# Altium PCB higgsant.PcbDoc
Units mm, origin at the board's own origin, x right, y up, seen from the top; angles counter-clockwise.
Board outline 200 x 200 mm, 4 copper layers (Top Layer, Signal Layer 1, Signal Layer 2, Bottom Layer), stack 1.667 mm thick; 22 components, 3 nets, 46 pads, 477 vias.
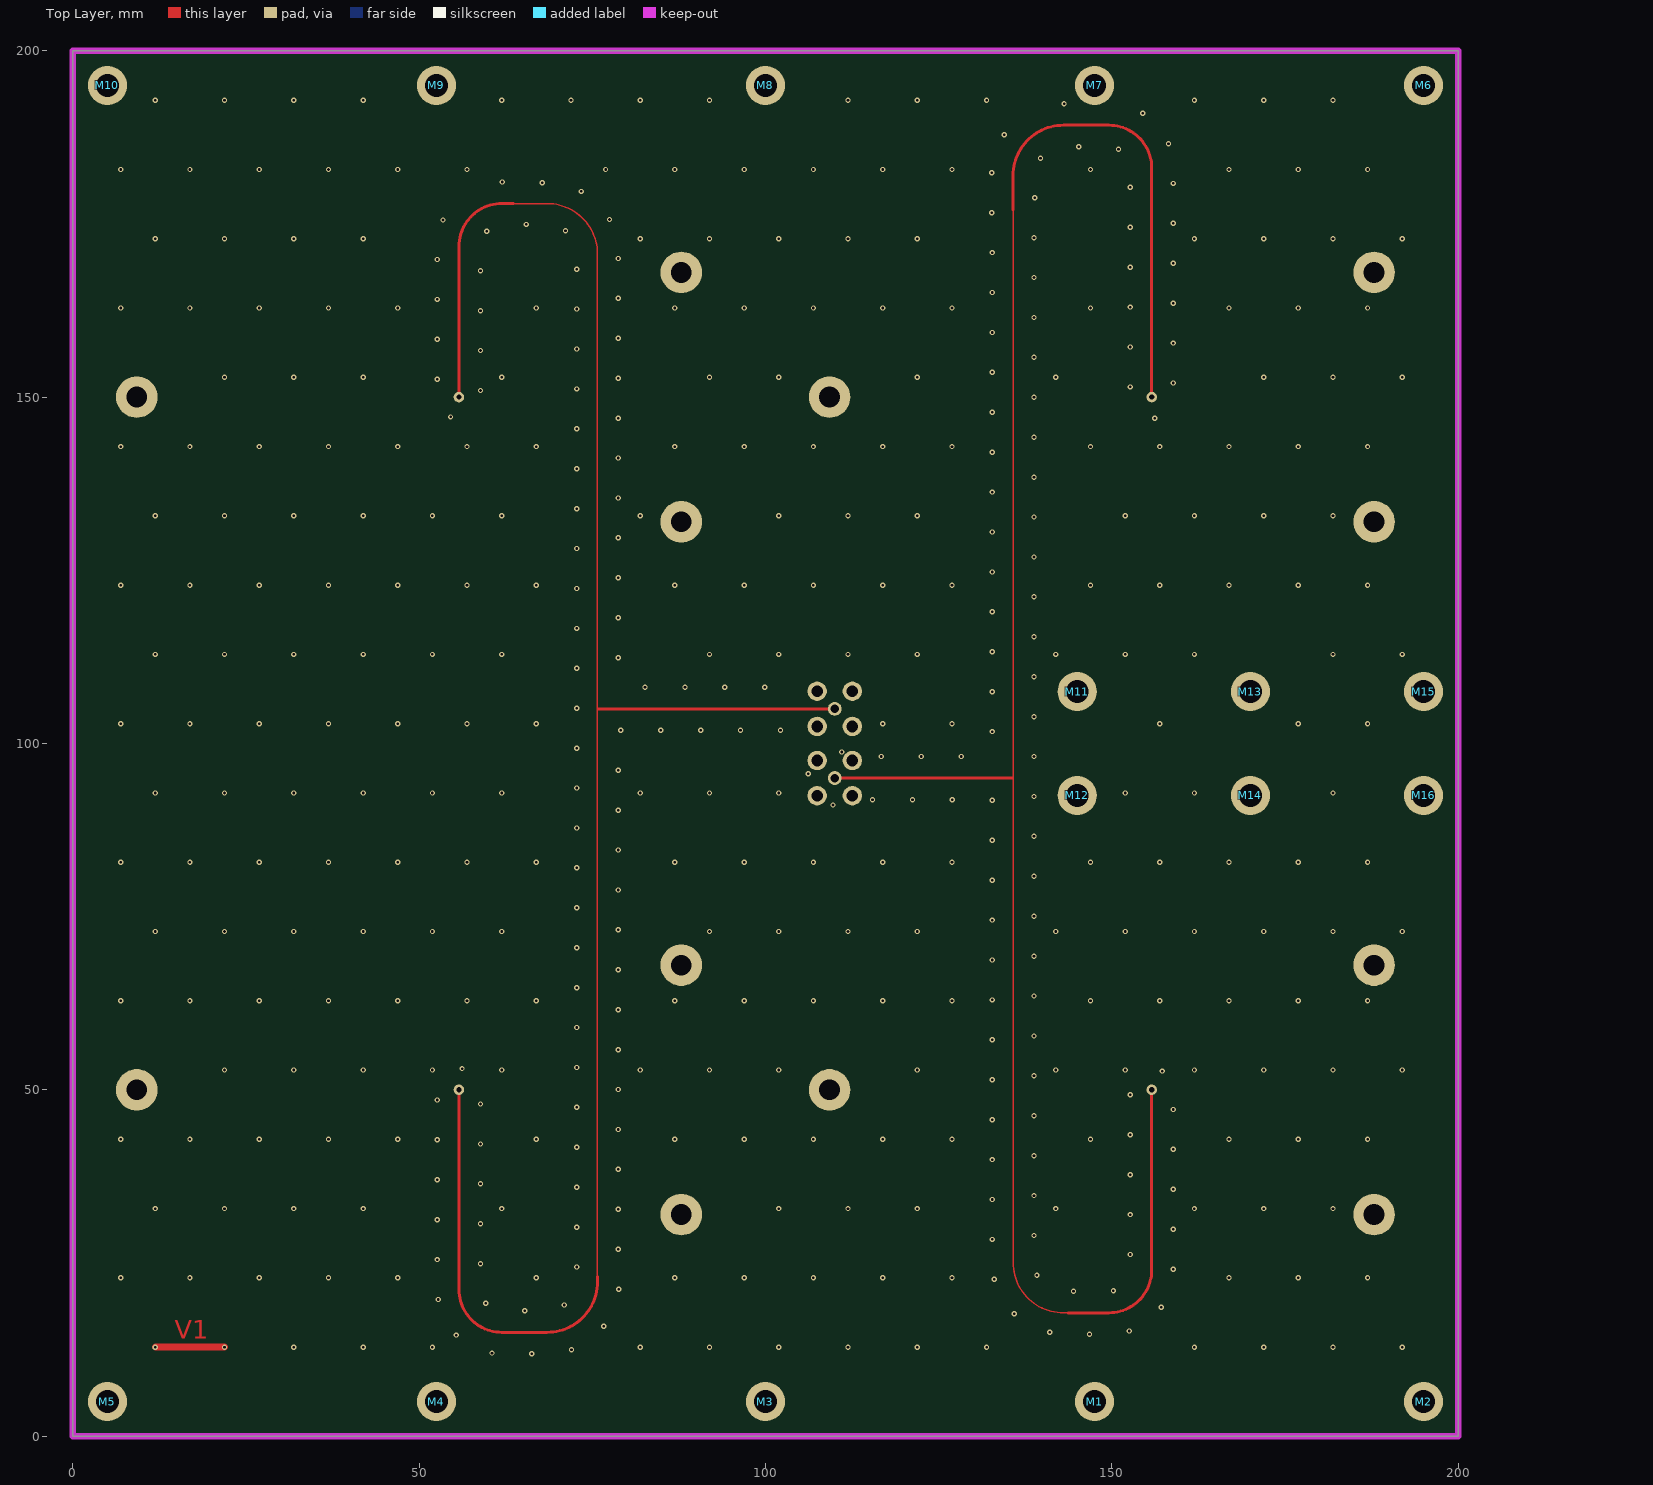
[diagram p0: Top Layer view]
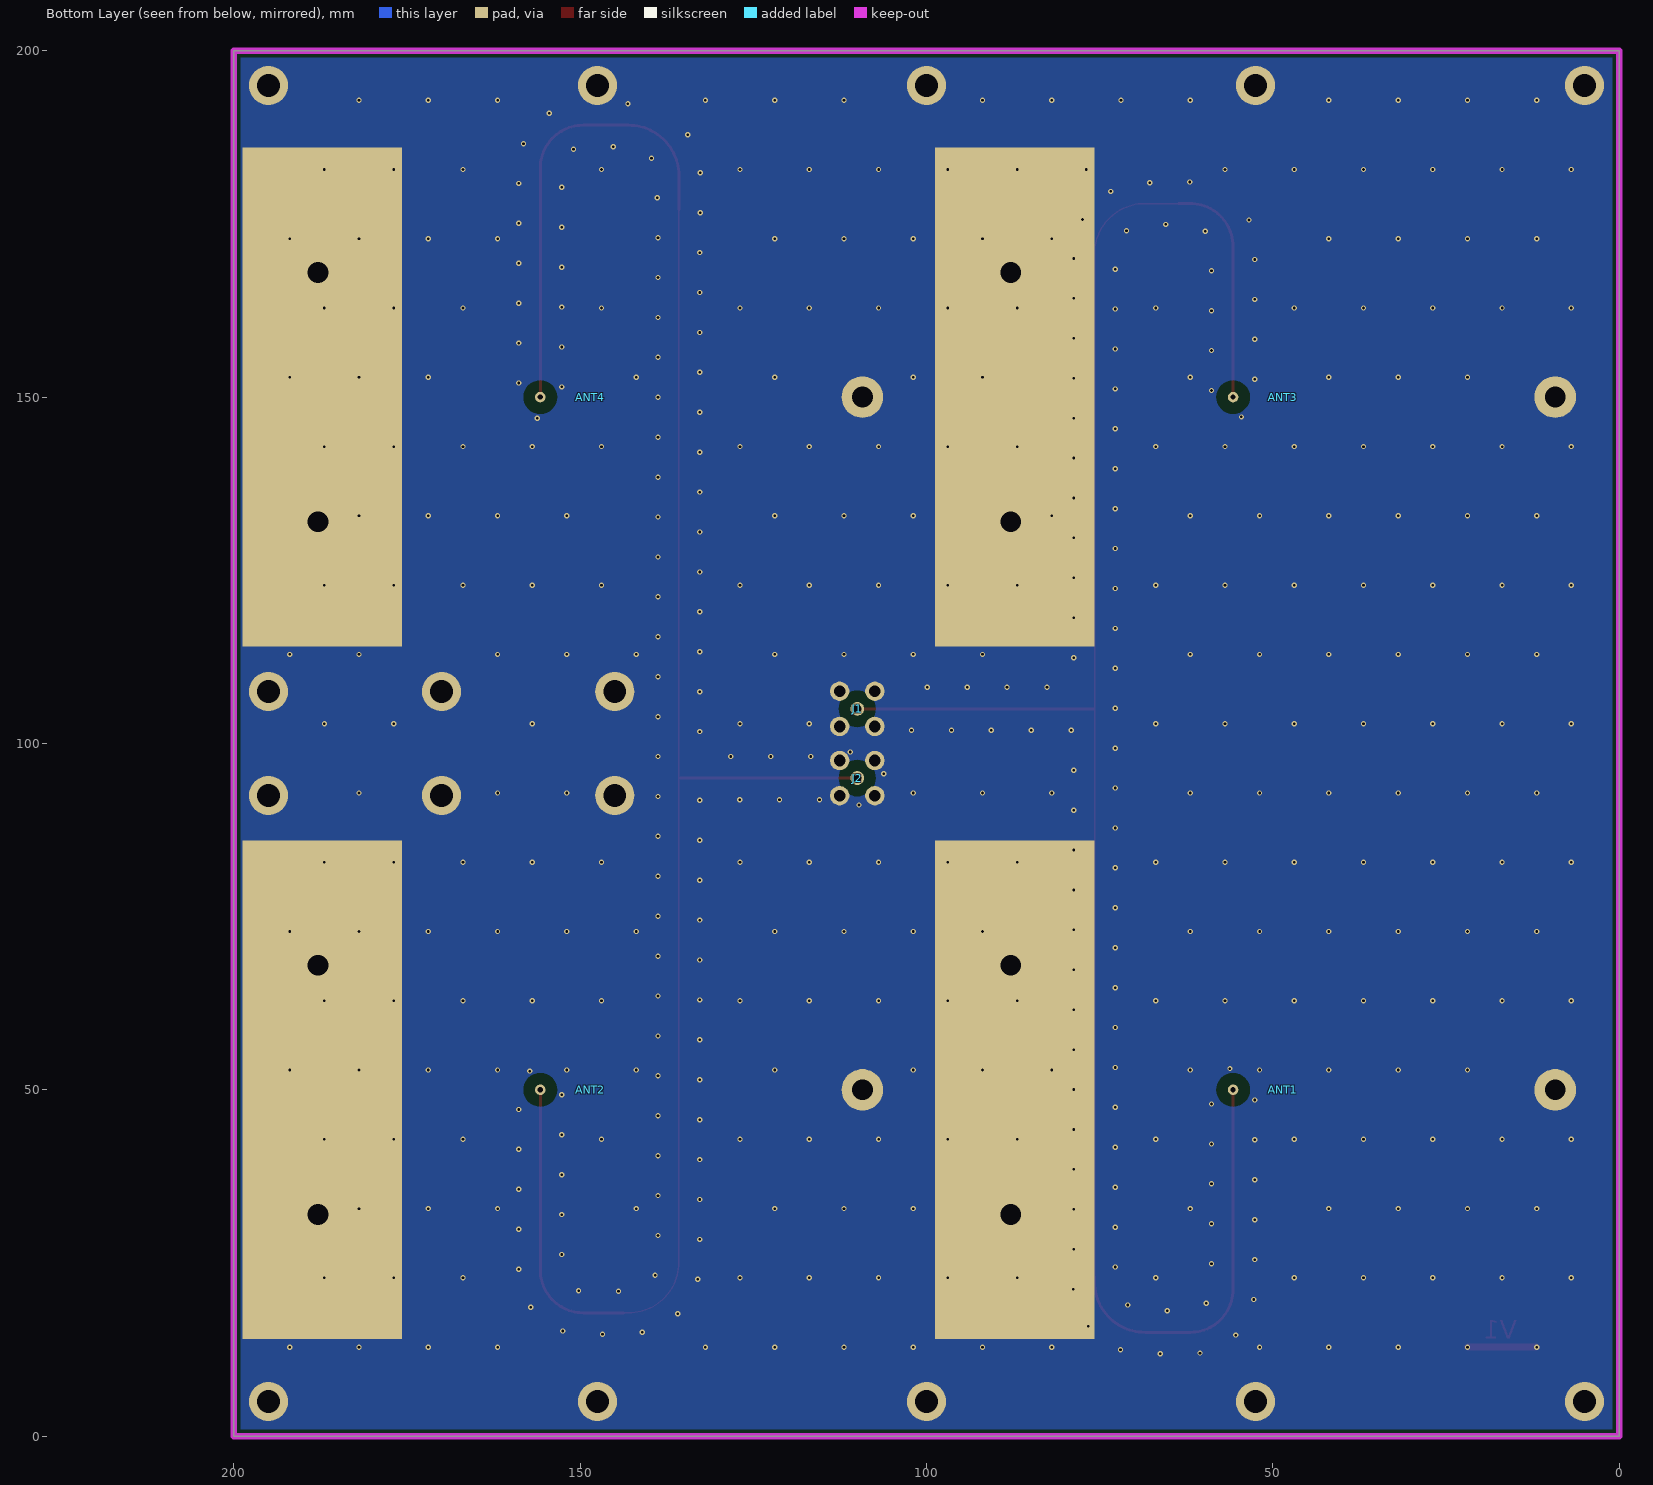
[diagram p1: Bottom Layer view, seen from below]
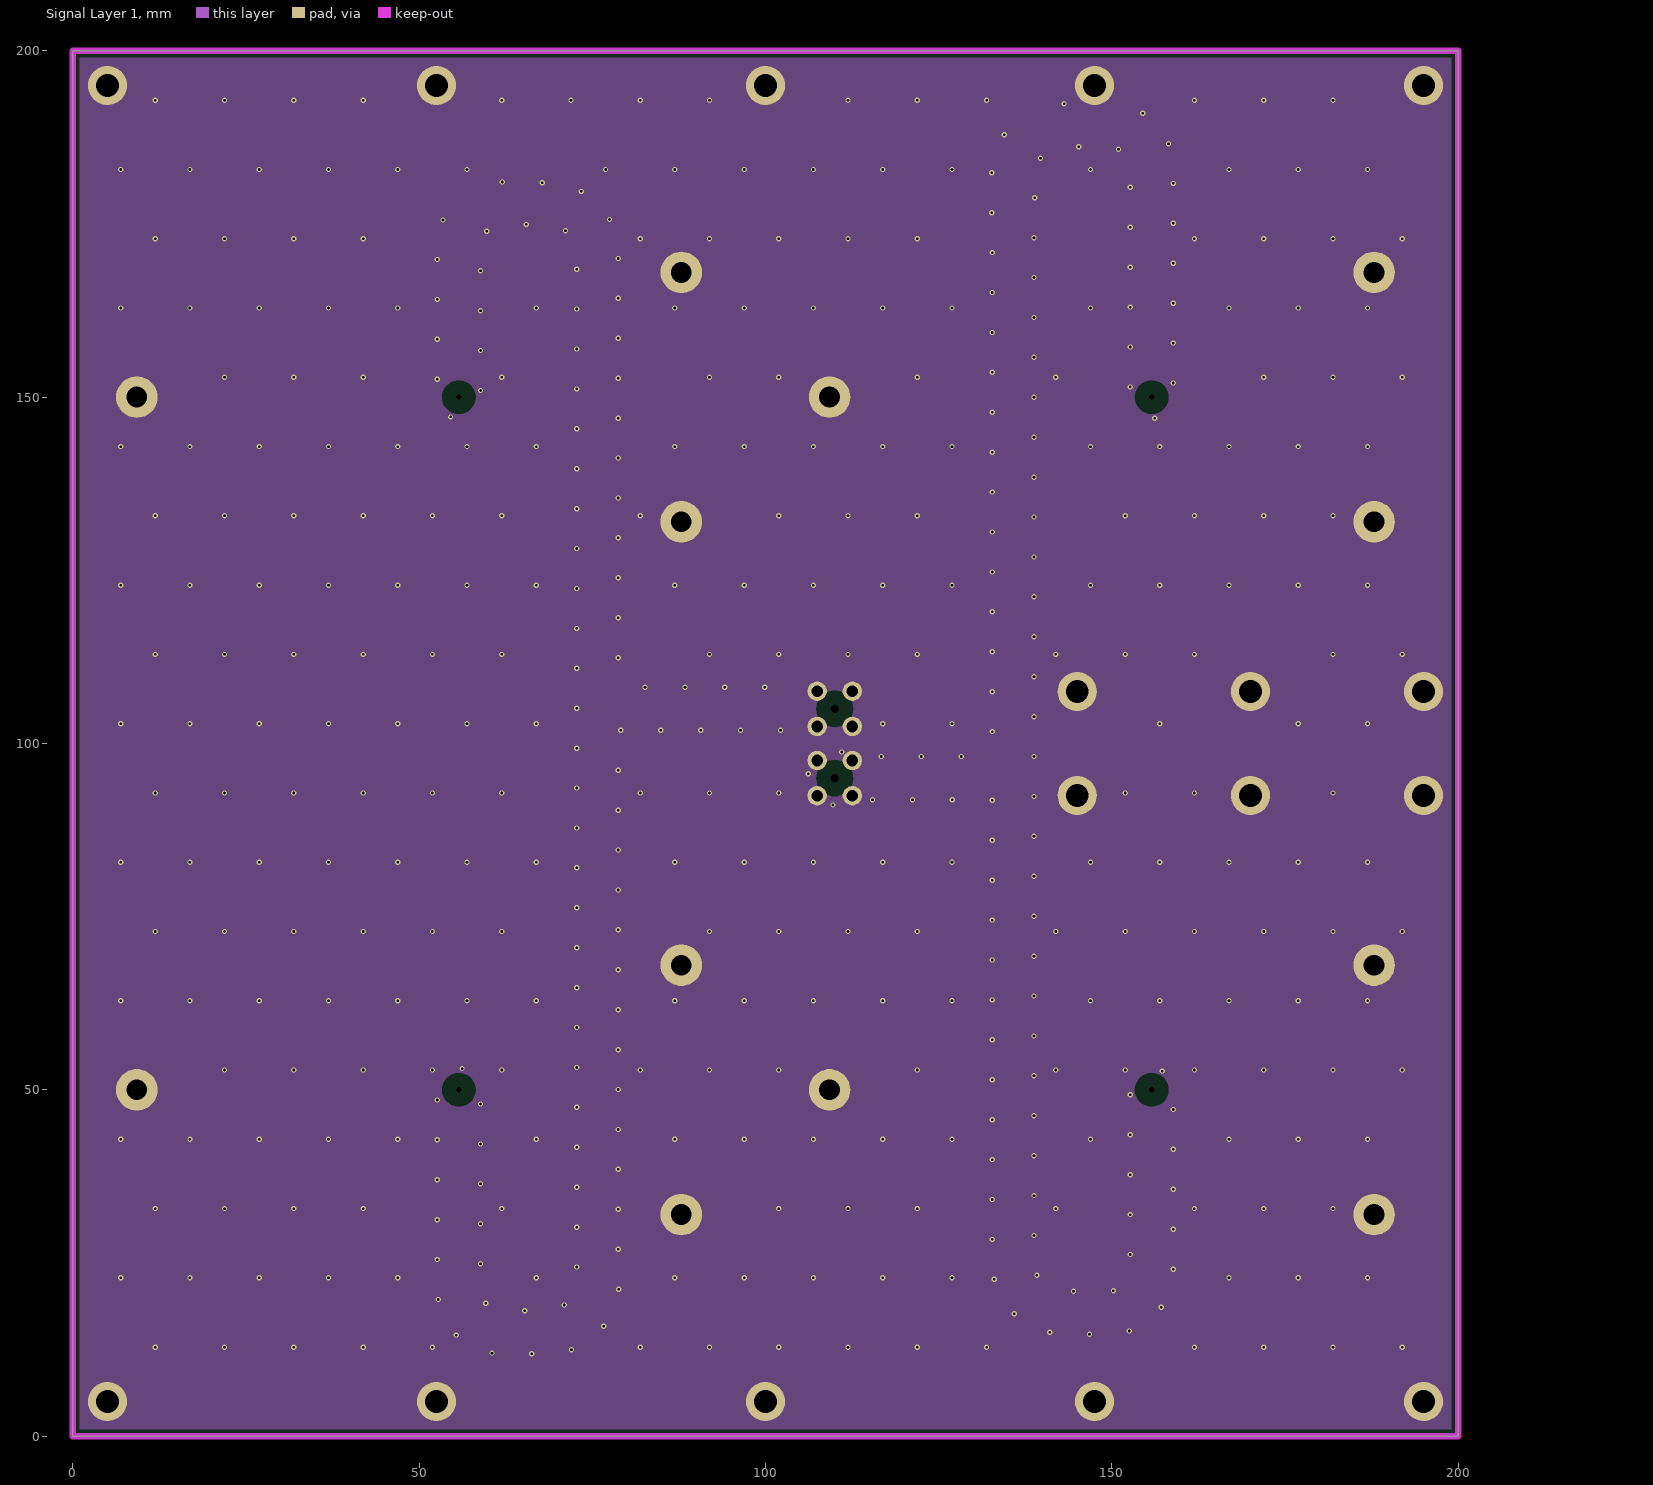
[diagram p2: Signal Layer 1]
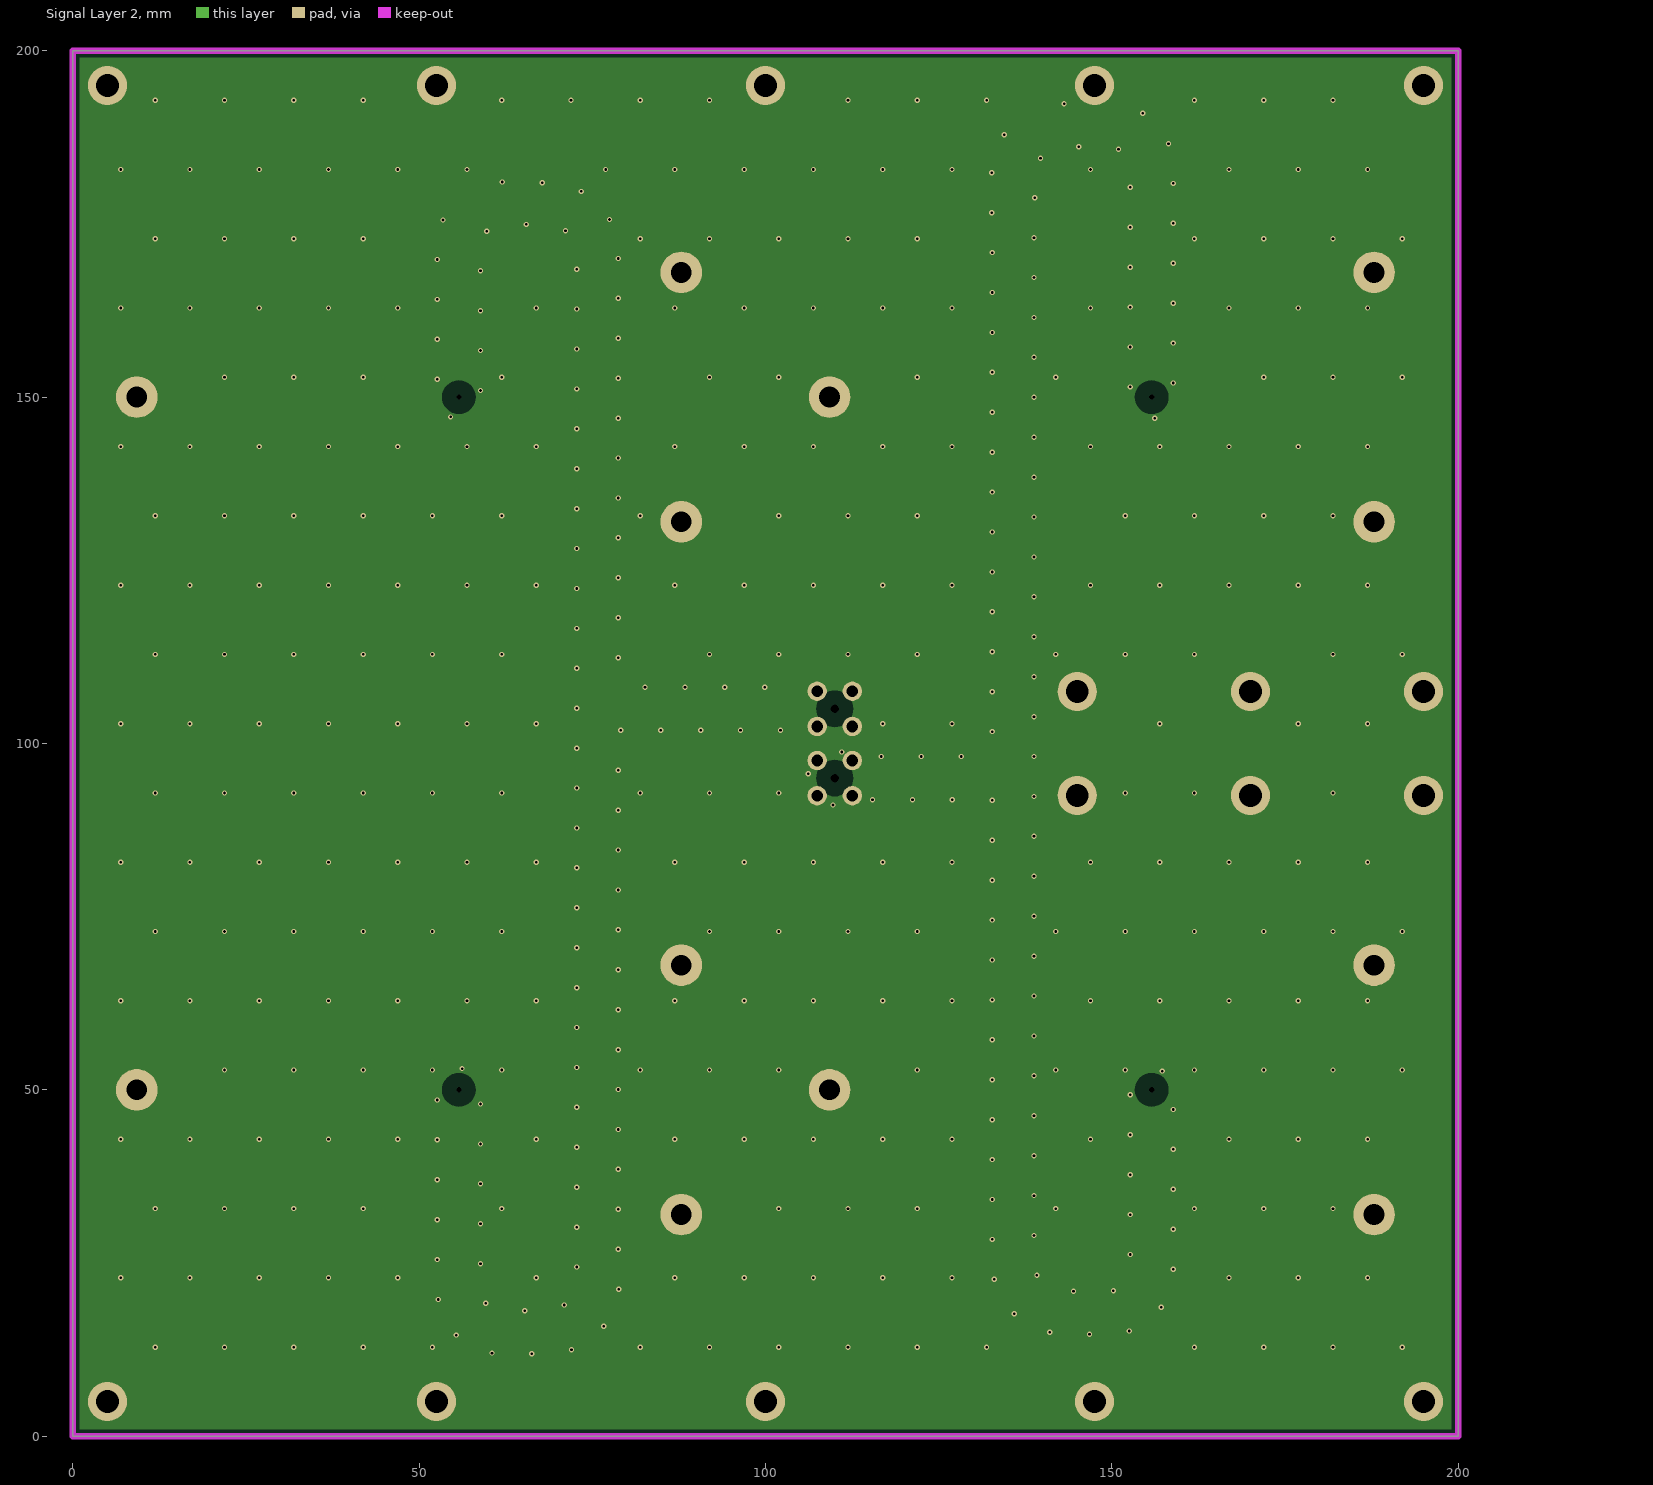
[diagram p3: Signal Layer 2]
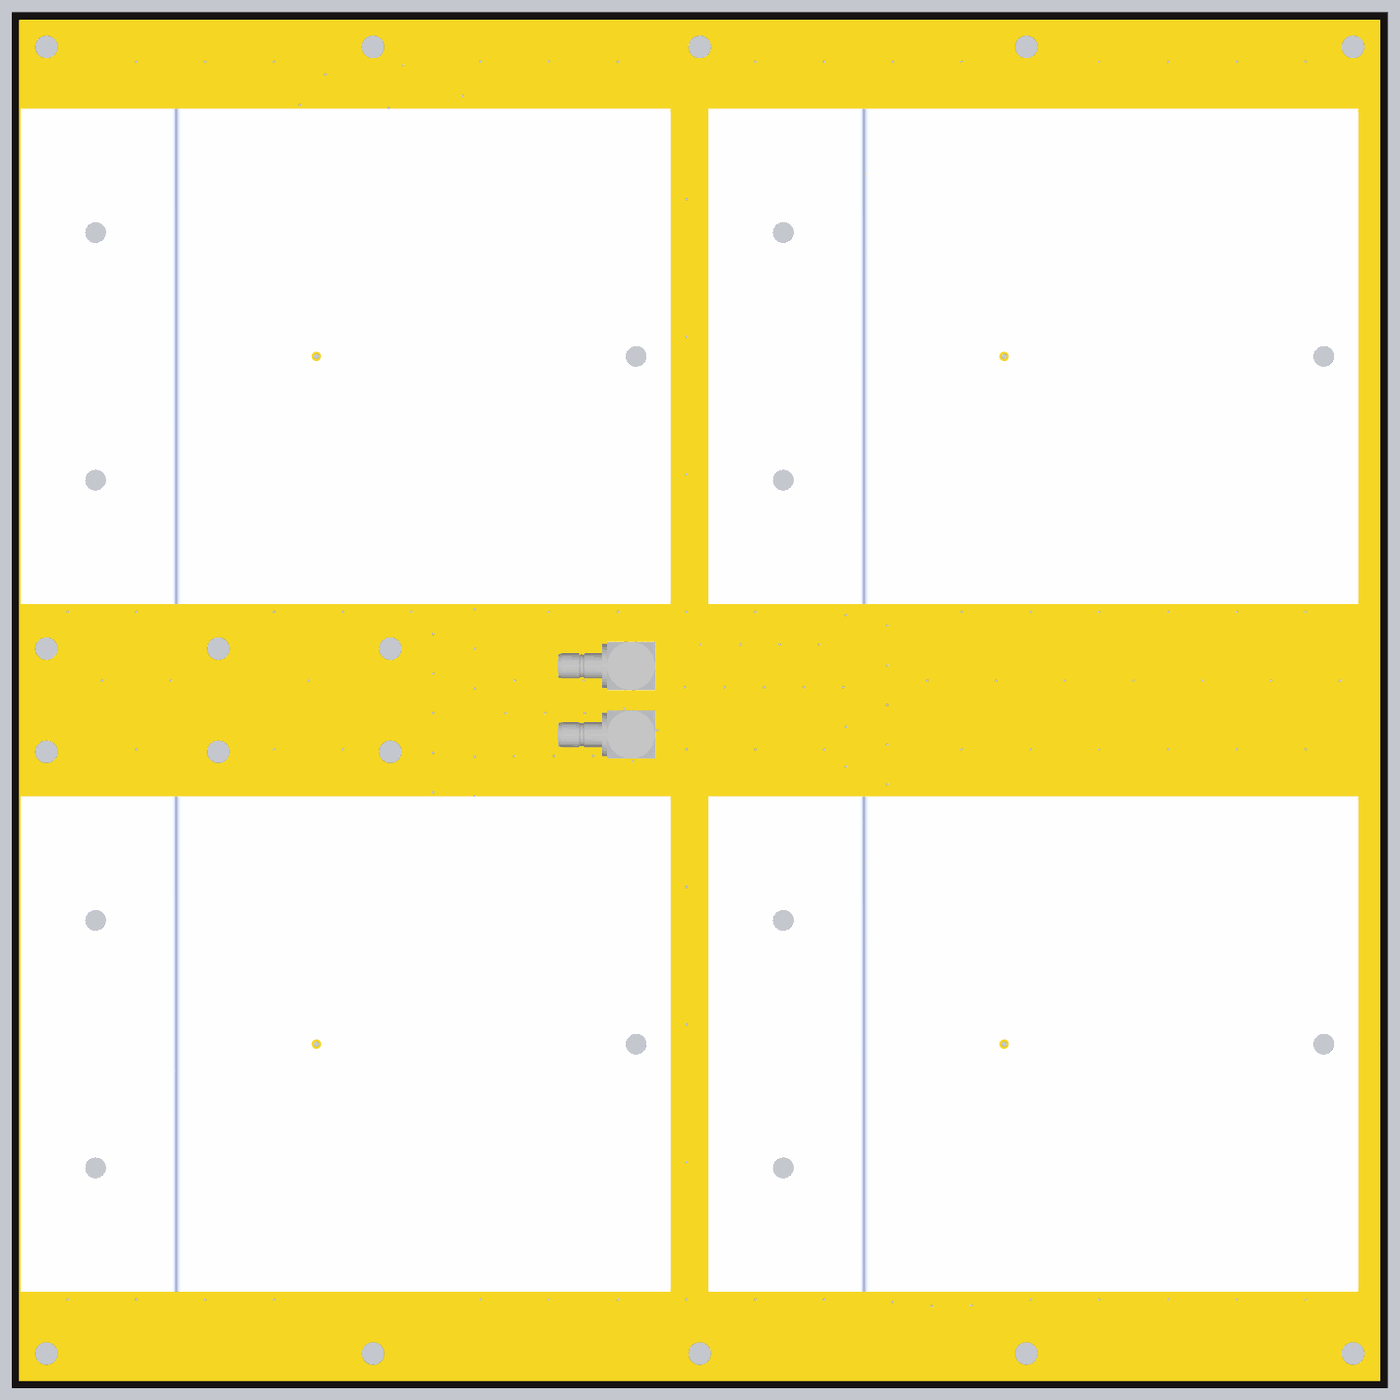
[diagram p4: 3D render of the assembled board from below, using the file's embedded part models]

## Layer stack, top to bottom
Top Solder: solder mask 0.0102, Solder Resist, Dk 3.5
Top Layer: signal copper 0.0356
Dielectric1: core 1.143, FR-4, Dk 4.8
Signal Layer 1: signal copper 0.036
Dielectric 5: prepreg 0.127, Dk 4.2
Signal Layer 2: signal copper 0.036
Dielectric 4: core 0.254, Dk 4.2
Bottom Layer: signal copper 0.0356
Bottom Solder: solder mask 0.0102, Solder Resist, Dk 3.5

## Board outline
0,0 200,0 200,200 0,200

## Design rules (kind name [scope] priority, off if disabled: settings)
Clearance "Stitching NetANT2_2" [IsStitchingVia and InNet('NetANT2_2') vs (IsVia and (Not IsStitchingVia)) Or IsPad] p1: gap=2.5 ignorepadtopadclearanceinfootprint=FALSE
Clearance [All] p2: gap=0.508 ignorepadtopadclearanceinfootprint=FALSE except(0: Arc-Text Track-Text SMDPad-Text THPad-Text Via-Text Fill-Text Poly-Text Region-Text Text-Text; 2.032: Fill-Hole Poly-Hole Region-Hole)
ComponentClearance [All] p1 off: gap=0.254 collisioncheckmode=3 verticalgap=0.254 showdistances=FALSE
HoleSize [All] p1: absolutevalues=TRUE maxlimit=25.4 minlimit=0.254 maxpercent=80.000 minpercent=20.000
PlaneConnect [All] p1: planeconnectstyle=Direct reliefexpansion=0.508 reliefentries=4 reliefconductorwidth=0.254 reliefairgap=0.254
PolygonConnect [All] p1: connectstyle=Direct reliefconductorwidth=0.254 reliefentries=4 polygonreliefangle="90 Angle" airgapwidth=0.254
RoutingVias [All] p1: holewidth=0.711 width=1.27 viastyle="Through Hole" minholewidth=0.711 minwidth=1.27 maxholewidth=0.711 maxwidth=1.27
SilkToSolderMaskClearance SilkscreenOverComponentPads [IsPad] p1: minsilkscreentomaskgap=0.254 clearancetoexposedcopper=TRUE
SolderMaskExpansion [All] p1: expansion=0.102
Width [All] p1: maxlimit=500 minlimit=0.089 preferedwidth=0.089
26 further rules are at their usual default settings.

## Classes and differential pairs
component class main: J1 J2 M1 M2 M3 M4 M5 M6 M7 M8 M9 M10 M11 M12 M13 M14 M15 M16

## Components (designator, comment, footprint, x,y, rotation, side; value= is the part's Value field where it differs from the comment)
ANT1 "antenna_plane" antenna_plane 51.5,50 r0 bottom
ANT2 "antenna_plane" antenna_plane 151.5,50 r0 bottom
ANT3 "antenna_plane" antenna_plane 51.5,150 r0 bottom
ANT4 "antenna_plane" antenna_plane 151.5,150 r0 bottom
J1 "142146" 142146 110,105 r180 bottom
J2 "142146" 142146 110,95 r180 bottom
M1 "MOUNT" MOUNTM3 147.5,5 r0 top
M2 "MOUNT" MOUNTM3 195,5 r0 top
M3 "MOUNT" MOUNTM3 100,5 r0 top
M4 "MOUNT" MOUNTM3 52.5,5 r0 top
M5 "MOUNT" MOUNTM3 5,5 r0 top
M6 "MOUNT" MOUNTM3 195,195 r0 top
M7 "MOUNT" MOUNTM3 147.5,195 r0 top
M8 "MOUNT" MOUNTM3 100,195 r0 top
M9 "MOUNT" MOUNTM3 52.5,195 r0 top
M10 "MOUNT" MOUNTM3 5,195 r0 top
M11 "MOUNT" MOUNTM3 145,107.5 r0 top
M12 "MOUNT" MOUNTM3 145,92.5 r0 top
M13 "MOUNT" MOUNTM3 170,107.5 r0 top
M14 "MOUNT" MOUNTM3 170,92.5 r0 top
M15 "MOUNT" MOUNTM3 195,107.5 r0 top
M16 "MOUNT" MOUNTM3 195,92.5 r0 top

## Footprints (in the part's own frame and the unit in brackets; to place one, negate y for a bottom-side part, rotate by r counter-clockwise, add the part's x,y. Pads: shape width x height; smd on the part's side, far side on the other; paste and mask are expansions set on the pad)
142146 [mm] "Connector; RF Coaxial, SMB, Thru-Hole; 5 Position; Right-Angle"
  round 2 / inner round 0 / far side round 2 hole 1.2: 1(0,0)
  round 2.8 hole 1.7: 2(-2.54,-2.54) 3(2.54,-2.54) 4(2.54,2.54) 5(-2.54,2.54)
  body extent -10.6,-3.5 3.5,3.5, height 9.06
antenna_plane [mm] "sheetmetal antenna plane"
  round 6 hole 3 paste-1.5: 1(-42.25,0) 1(36.35,-18)
  rect 23x72 smd paste-11.5: 1(35.75,0)
  round 6 hole 3 paste-1.5 mask+3: 1(36.35,18)
  round 1.524 / inner round 0 / far side round 1.524 hole 0.762: 2(4.25,0)
  body extent -47.25,-36 47.25,36, height 10.9
MOUNTM3 [mm] "M3 Mounting Hole"
  round 5.65 hole 3.3: 1(0,0)

## Part data
ANT1 ANT2 ANT3 ANT4: Manufacturer=Siglabs, Manufacturer P/N=antenna_plane
J1 J2: library part COAX-F, "Connector; RF Coaxial, SMB, Thru-Hole; 5 Position; Right-Angle", Manufacturer="Amphenol RF", Manufacturer P/N=142146
M1 M2 M3 M4 M5 M6 M7 M8 M9 M10 M11 M12 M13 M14 M15 M16: "M3 Standard Fit Hole"

## Via types
v1: diameter 0.762, hole 0.381, Top Layer to Bottom Layer, 477 vias

## Nets (pads, with @x,y where several pads share a name; then routed paths per layer and width w, separated by ;. In a path a pad name is that pad's centre, name@x,y a point inside that pad or via, vN(x,y) a via of type N, cw(c..) or ccw(c..) an arc to the next point about the centre after c; other vN are vias at no path point)
GND: ANT1.1 ANT2.1 ANT3.1 ANT4.1 J1.2 J1.3 J1.4 J1.5 J2.2 J2.3 J2.4 J2.5 M1.1 M2.1 M3.1 M4.1 M5.1 M6.1 M7.1 M8.1 M9.1 M10.1 M11.1 M12.1 M13.1 M14.1 M15.1 M16.1 | length 10
  Top Layer w1: v1(11.92,12.858) v1(21.92,12.858)
  other v1: 66.277,11.89 60.517,12.001 72.007,12.502 31.92,12.858 41.92,12.858 51.92,12.858 81.92,12.858 91.92,12.858 101.92,12.858 111.92,12.858 121.92,12.858 131.92,12.858 161.92,12.858 171.92,12.858 181.92,12.858 191.92,12.858 55.374,14.601 146.775,14.705 141.021,15.005 152.517,15.184 76.672,15.883 135.907,17.66 65.263,18.11 157.142,18.62 70.966,18.938 59.603,19.189 52.757,19.734 144.464,20.925 150.226,21.001 78.813,21.233 133.031,22.653 6.92,22.858 16.92,22.858 26.92,22.858 36.92,22.858 46.92,22.858 66.92,22.858 86.92,22.858 96.92,22.858 106.92,22.858 116.92,22.858 126.92,22.858 166.92,22.858 176.92,22.858 186.92,22.858 139.181,23.224 158.86,24.12 72.74,24.42 58.86,24.903 52.64,25.495 152.64,26.233 78.76,26.995 132.74,28.408 138.76,28.97 158.86,29.882 72.74,30.182 58.86,30.665 52.64,31.257 152.64,31.995 78.76,32.757 11.92,32.858 21.92,32.858 31.92,32.858 41.92,32.858 61.92,32.858 101.92,32.858 111.92,32.858 121.92,32.858 141.92,32.858 161.92,32.858 171.92,32.858 181.92,32.858 132.74,34.17 138.76,34.732 158.86,35.644 72.74,35.944 58.86,36.427 52.64,37.019 152.64,37.757 78.76,38.519 132.74,39.932 138.76,40.494 158.86,41.406 72.74,41.706 58.86,42.189 52.64,42.781 6.92,42.858 16.92,42.858 26.92,42.858 36.92,42.858 46.92,42.858 66.92,42.858 86.92,42.858 96.92,42.858 106.92,42.858 116.92,42.858 126.92,42.858 146.92,42.858 166.92,42.858 176.92,42.858 186.92,42.858 152.64,43.519 78.76,44.281 132.74,45.694 138.76,46.256 158.86,47.168 72.74,47.468 58.86,47.951 52.64,48.543 152.64,49.281 78.76,50.043 132.74,51.456 138.76,52.018 157.273,52.707 21.92,52.858 31.92,52.858 41.92,52.858 51.92,52.858 61.92,52.858 81.92,52.858 91.92,52.858 101.92,52.858 121.92,52.858 141.92,52.858 151.92,52.858 161.92,52.858 171.92,52.858 181.92,52.858 191.92,52.858 56.208,53.067 72.74,53.23 78.76,55.805 132.74,57.218 138.76,57.78 72.74,58.992 78.76,61.567 6.92,62.858 16.92,62.858 26.92,62.858 36.92,62.858 46.92,62.858 56.92,62.858 66.92,62.858 86.92,62.858 96.92,62.858 106.92,62.858 116.92,62.858 126.92,62.858 146.92,62.858 156.92,62.858 166.92,62.858 176.92,62.858 186.92,62.858 132.74,62.98 138.76,63.542 72.74,64.754 78.76,67.329 132.74,68.742 138.76,69.304 72.74,70.516 11.92,72.858 21.92,72.858 31.92,72.858 41.92,72.858 51.92,72.858 61.92,72.858 91.92,72.858 101.92,72.858 111.92,72.858 121.92,72.858 141.92,72.858 151.92,72.858 161.92,72.858 171.92,72.858 181.92,72.858 191.92,72.858 78.76,73.091 132.74,74.504 138.76,75.066 72.74,76.278 78.76,78.853 132.74,80.266 138.76,80.828 72.74,82.04 6.92,82.858 16.92,82.858 26.92,82.858 36.92,82.858 46.92,82.858 56.92,82.858 66.92,82.858 86.92,82.858 96.92,82.858 106.92,82.858 116.92,82.858 126.92,82.858 146.92,82.858 156.92,82.858 166.92,82.858 176.92,82.858 186.92,82.858 78.76,84.615 132.74,86.028 138.76,86.59 72.74,87.802 78.76,90.377 109.744,91.12 132.74,91.79 115.455,91.89 121.217,91.89 126.979,91.89 138.76,92.352 11.92,92.858 21.92,92.858 31.92,92.858 41.92,92.858 51.92,92.858 61.92,92.858 81.92,92.858 91.92,92.858 101.92,92.858 151.92,92.858 161.92,92.858 181.92,92.858 72.74,93.564 106.16,95.631 78.76,96.139 116.719,98.11 122.481,98.11 128.243,98.11 138.76,98.114 110.995,98.765 72.74,99.326 132.74,101.713 79.115,101.89 84.877,101.89 90.639,101.89 96.401,101.89 102.163,101.89 6.92,102.858 16.92,102.858 26.92,102.858 36.92,102.858 46.92,102.858 56.92,102.858 66.92,102.858 116.92,102.858 126.92,102.858 156.92,102.858 176.92,102.858 186.92,102.858 138.76,103.876 72.74,105.088 132.74,107.475 82.616,108.11 88.378,108.11 94.14,108.11 99.902,108.11 138.76,109.638 72.74,110.85 78.76,112.392 11.92,112.858 21.92,112.858 31.92,112.858 41.92,112.858 51.92,112.858 61.92,112.858 91.92,112.858 101.92,112.858 111.92,112.858 121.92,112.858 141.92,112.858 151.92,112.858 161.92,112.858 181.92,112.858 191.92,112.858 132.74,113.237 138.76,115.4 72.74,116.612 78.76,118.154 132.74,118.999 138.76,121.162 72.74,122.374 6.92,122.858 16.92,122.858 26.92,122.858 36.92,122.858 46.92,122.858 56.92,122.858 66.92,122.858 86.92,122.858 96.92,122.858 106.92,122.858 116.92,122.858 126.92,122.858 146.92,122.858 156.92,122.858 166.92,122.858 176.92,122.858 186.92,122.858 78.76,123.916 132.74,124.761 138.76,126.924 72.74,128.136 78.76,129.678 132.74,130.523 138.76,132.686 11.92,132.858 21.92,132.858 31.92,132.858 41.92,132.858 51.92,132.858 61.92,132.858 81.92,132.858 101.92,132.858 111.92,132.858 121.92,132.858 151.92,132.858 161.92,132.858 171.92,132.858 181.92,132.858 72.74,133.898 78.76,135.44 132.74,136.285 138.76,138.448 72.74,139.66 78.76,141.202 132.74,142.047 6.92,142.858 16.92,142.858 26.92,142.858 36.92,142.858 46.92,142.858 56.92,142.858 66.92,142.858 86.92,142.858 96.92,142.858 106.92,142.858 116.92,142.858 126.92,142.858 146.92,142.858 156.92,142.858 166.92,142.858 176.92,142.858 186.92,142.858 138.76,144.21 72.74,145.422 156.188,146.929 78.76,146.964 54.545,147.139 132.74,147.809 138.76,149.972 58.86,150.958 72.74,151.184 152.64,151.47 158.86,152.034 52.64,152.577 78.76,152.726 21.92,152.858 31.92,152.858 41.92,152.858 61.92,152.858 91.92,152.858 101.92,152.858 121.92,152.858 141.92,152.858 171.92,152.858 181.92,152.858 191.92,152.858 132.74,153.571 138.76,155.734 58.86,156.72 72.74,156.946 152.64,157.232 158.86,157.796 52.64,158.339 78.76,158.488 132.74,159.333 138.76,161.496 58.86,162.482 72.74,162.708 6.92,162.858 16.92,162.858 26.92,162.858 36.92,162.858 46.92,162.858 66.92,162.858 86.92,162.858 96.92,162.858 106.92,162.858 116.92,162.858 126.92,162.858 146.92,162.858 166.92,162.858 176.92,162.858 186.92,162.858 152.64,162.994 158.86,163.558 52.64,164.101 78.76,164.25 132.74,165.095 138.76,167.258 58.86,168.244 72.74,168.47 152.64,168.756 158.86,169.32 52.64,169.863 78.76,170.012 132.74,170.857 11.92,172.858 21.92,172.858 31.92,172.858 41.92,172.858 81.92,172.858 91.92,172.858 101.92,172.858 111.92,172.858 121.92,172.858 161.92,172.858 171.92,172.858 181.92,172.858 191.92,172.858 138.76,173.02 59.773,173.933 71.137,174.004 152.64,174.518 65.449,174.925 158.86,175.082 53.458,175.567 77.477,175.629 132.668,176.619 138.86,178.782 73.39,179.691 152.64,180.28 158.86,180.844 67.766,180.945 62.005,181.045 132.65,182.38 6.92,182.858 16.92,182.858 26.92,182.858 36.92,182.858 46.92,182.858 56.92,182.858 76.92,182.858 86.92,182.858 96.92,182.858 106.92,182.858 116.92,182.858 126.92,182.858 146.92,182.858 166.92,182.858 176.92,182.858 186.92,182.858 139.699,184.482 150.969,185.794 145.218,186.14 158.173,186.565 134.458,187.851 154.457,190.969 143.104,192.36 11.92,192.858 21.92,192.858 31.92,192.858 41.92,192.858 61.92,192.858 71.92,192.858 81.92,192.858 91.92,192.858 111.92,192.858 121.92,192.858 131.92,192.858 161.92,192.858 171.92,192.858 181.92,192.858
NetANT1_2: ANT1.2 ANT3.2 J1.1 | length 288.5
  Top Layer w0.222: 63.6,177.935 68.492,177.935 cw(c68.492,170.677) 75.75,170.677 75.75,105 75.75,23.02
  Top Layer w0.432: ANT1.2 55.75,21.181 ccw(c61.931,21.181) 61.931,15 68.492,15 ccw(c68.492,22.258) 75.75,22.258 75.75,23.02 ; ANT3.2 55.75,171.754 cw(c61.931,171.754) 61.931,177.935 63.6,177.935 ; 75.875,105 J1.1
NetANT2_2: ANT2.2 ANT4.2 J2.1 | length 297
  Top Layer w0.222: 135.75,25 135.75,95 135.75,176.98 ; 135.75,25.073 ccw(c143.008,25.073) 143.008,17.815 143.65,17.815
  Top Layer w0.432: J2.1 135.625,95 ; 135.75,176.98 135.75,181.992 cw(c143.008,181.992) 143.008,189.25 149.569,189.25 cw(c149.569,183.069) 155.75,183.069 ; 143.65,17.815 149.569,17.815 ccw(c149.569,23.996) 155.75,23.996 ; 155.75,24 ANT2.2 ; ANT4.2 155.75,183

## Polygon pours and split planes (outlines as drawn)
no net on Mechanical 16 "NONET_L-01_P-001" (solid): 72.51,-28.022 72.688,-27.777 72.821,-27.533 72.932,-27.266 73.021,-26.999 73.088,-26.711 73.11,-26.422 73.132,-26.11 73.11,-25.799 73.088,-25.488 73.021,-25.199 72.932,-24.91 72.821,-24.666 72.688,-24.421 72.532,-24.177 72.354,-23.955 72.154,-23.755 71.954,-23.599 71.732,-23.443 71.488,-23.332 71.265,-23.243 70.999,-23.177 70.732,-23.132 70.221,-23.132 69.976,-23.177 69.732,-23.221 69.51,-23.31 69.287,-23.421 69.087,-23.555 68.887,-23.71 68.687,-23.888 68.687,-23.266 67.265,-23.266 67.265,-28.933 68.687,-28.933 68.687,-28.333 68.887,-28.511 69.11,-28.689 69.31,-28.8 69.532,-28.911 69.732,-28.978 69.954,-29.044 70.199,-29.066 70.421,-29.089 70.71,-29.066 70.954,-29.022 71.221,-28.955 71.443,-28.866 71.688,-28.755 71.91,-28.6 72.132,-28.422 72.332,-28.222
no net on Mechanical 16 "NONET_L-01_P-001" (solid): 73.71,-34 73.799,-33.889 73.866,-33.756 73.932,-33.645 73.977,-33.511 74.021,-33.378 74.021,-33.222 74.044,-33.089 74.021,-32.911 73.999,-32.778 73.977,-32.622 73.91,-32.489 73.843,-32.356 73.777,-32.222 73.666,-32.111 73.555,-32 73.355,-31.845 73.11,-31.711 72.866,-31.645 72.599,-31.622 72.421,-31.645 72.221,-31.667 72.043,-31.733 71.865,-31.822 71.71,-31.933 71.554,-32.045 71.443,-32.2 71.332,-32.356 71.243,-32.534 71.199,-32.711 71.154,-32.889 71.132,-33.067 71.154,-33.267 71.199,-33.445 71.243,-33.623 71.332,-33.8 71.443,-33.978 71.554,-34.111 71.71,-34.223 71.865,-34.334 72.043,-34.423 72.221,-34.489 72.399,-34.512 72.599,-34.534 72.754,-34.534 72.888,-34.512 73.021,-34.467 73.155,-34.423 73.288,-34.356 73.399,-34.289 73.51,-34.2 73.621,-34.111
no net on Mechanical 16 "NONET_L-01_P-001" (solid): 78.733,-34 78.8,-33.889 78.866,-33.778 78.933,-33.645 78.977,-33.511 79,-33.378 79.022,-33.089 79,-32.778 78.933,-32.511 78.866,-32.378 78.822,-32.245 78.733,-32.133 78.644,-32.045 78.444,-31.845 78.333,-31.778 78.222,-31.733 78.111,-31.689 77.977,-31.645 77.733,-31.622 77.488,-31.645 77.266,-31.711 77.044,-31.845 76.866,-32 76.866,-31.689 76.155,-31.689 76.155,-34.467 76.866,-34.467 76.866,-34.178 77.066,-34.334 77.266,-34.445 77.488,-34.512 77.711,-34.534 77.844,-34.534 77.955,-34.512 78.088,-34.467 78.2,-34.423 78.311,-34.378 78.422,-34.289 78.644,-34.111
no net on Mechanical 16 "NONET_L-01_P-001" (solid): 83.711,-34 83.778,-33.889 83.867,-33.756 83.911,-33.645 83.956,-33.511 84,-33.378 84.023,-33.222 84.023,-32.911 84,-32.778 83.956,-32.622 83.911,-32.489 83.845,-32.356 83.756,-32.222 83.667,-32.111 83.556,-32 83.334,-31.845 83.111,-31.711 82.845,-31.645 82.6,-31.622 82.4,-31.645 82.222,-31.667 82.022,-31.733 81.867,-31.822 81.689,-31.933 81.556,-32.045 81.422,-32.2 81.311,-32.356 81.244,-32.534 81.178,-32.711 81.133,-32.889 81.133,-33.267 81.178,-33.445 81.244,-33.623 81.311,-33.8 81.422,-33.978 81.556,-34.111 81.689,-34.223 81.844,-34.334 82.022,-34.423 82.2,-34.489 82.4,-34.512 82.6,-34.534 82.733,-34.534 82.867,-34.512 83,-34.467 83.134,-34.423 83.267,-34.356 83.378,-34.289 83.489,-34.2 83.6,-34.111
no net on Mechanical 16 "NONET_L-01_P-001" (solid): 86.645,-34.467 86.645,-34.178 86.423,-34.334 86.223,-34.445 86.023,-34.512 85.778,-34.534 85.645,-34.534 85.512,-34.512 85.4,-34.467 85.289,-34.423 85.178,-34.378 85.067,-34.289 84.845,-34.111 84.756,-34 84.689,-33.889 84.623,-33.778 84.556,-33.645 84.511,-33.511 84.489,-33.378 84.467,-33.089 84.489,-32.778 84.556,-32.511 84.6,-32.378 84.667,-32.245 84.756,-32.133 84.845,-32.045 85.045,-31.845 85.156,-31.778 85.267,-31.733 85.378,-31.689 85.512,-31.645 85.756,-31.622 86.001,-31.645 86.223,-31.711 86.445,-31.845 86.645,-32 86.645,-30.622 87.312,-30.622 87.312,-34.467
no net on Mechanical 16 "NONET_L-01_P-001" (solid): 90.579,-34 90.668,-33.889 90.734,-33.778 90.779,-33.645 90.823,-33.511 90.868,-33.378 90.89,-33.089 90.868,-32.778 90.779,-32.511 90.734,-32.378 90.668,-32.245 90.601,-32.133 90.512,-32.045 90.312,-31.845 90.201,-31.778 90.09,-31.733 89.979,-31.689 89.845,-31.645 89.579,-31.622 89.357,-31.645 89.112,-31.711 88.912,-31.845 88.712,-32 88.712,-31.689 88.023,-31.689 88.023,-34.467 88.712,-34.467 88.712,-34.178 88.912,-34.334 89.134,-34.445 89.334,-34.512 89.557,-34.534 89.69,-34.534 89.823,-34.512 89.957,-34.467 90.068,-34.423 90.179,-34.378 90.29,-34.289 90.49,-34.111
no net on Mechanical 16 "NONET_L-01_P-001" (solid): 86.178,-30.133 86.334,-29.889 86.467,-29.622 86.556,-29.355 85,-29.355 84.889,-29.466 84.756,-29.555 84.623,-29.644 84.467,-29.711 84.289,-29.778 84.111,-29.8 83.889,-29.822 83.689,-29.844 83.4,-29.822 83.156,-29.8 82.956,-29.733 82.756,-29.666 82.6,-29.555 82.467,-29.466 82.356,-29.333 82.267,-29.2 82.2,-29.044 82.156,-28.822 82.133,-28.555 82.133,-28.244 82.311,-28.4 82.511,-28.555 82.711,-28.666 82.911,-28.777 83.134,-28.844 83.356,-28.889 83.6,-28.933 84.134,-28.933 84.4,-28.889 84.645,-28.822 84.889,-28.733 85.134,-28.622 85.356,-28.466 85.578,-28.311 85.778,-28.111 85.956,-27.911 86.112,-27.666 86.245,-27.444 86.356,-27.177 86.445,-26.911 86.512,-26.644 86.556,-26.333 86.556,-25.71 86.512,-25.399 86.445,-25.088 86.356,-24.821 86.223,-24.555 86.089,-24.31 85.912,-24.066 85.734,-23.866 85.534,-23.688 85.334,-23.532 85.112,-23.421 84.889,-23.31 84.667,-23.221 84.423,-23.177 84.178,-23.132 83.689,-23.132 83.445,-23.177 83.222,-23.221 83,-23.31 82.778,-23.399 82.556,-23.532 82.333,-23.71 82.133,-23.888 82.133,-23.266 80.711,-23.266 80.711,-28.466 80.755,-28.8 80.8,-29.089 80.844,-29.378 80.933,-29.622 81.044,-29.844 81.156,-30.067 81.289,-30.244 81.489,-30.444 81.733,-30.644 81.978,-30.8 82.267,-30.933 82.556,-31.022 82.889,-31.089 83.245,-31.133 83.622,-31.156 84.023,-31.133 84.4,-31.111 84.734,-31.044 85.023,-30.956 85.289,-30.822 85.556,-30.689 85.778,-30.533 85.978,-30.333
no net on Mechanical 16 "NONET_L-01_P-001" (solid): 67.487,-34.023 67.554,-33.911 67.643,-33.778 67.687,-33.667 67.732,-33.534 67.776,-33.378 67.798,-33.089 67.776,-32.8 67.732,-32.645 67.687,-32.511 67.643,-32.378 67.576,-32.267 67.487,-32.156 67.376,-32.045 67.287,-31.956 67.176,-31.867 67.043,-31.778 66.932,-31.733 66.798,-31.689 66.665,-31.645 66.509,-31.622 66.198,-31.622 66.065,-31.645 65.909,-31.689 65.776,-31.733 65.642,-31.778 65.531,-31.867 65.42,-31.956 65.309,-32.045 65.198,-32.156 65.131,-32.267 65.065,-32.4 64.998,-32.534 64.953,-32.667 64.931,-32.822 64.909,-32.978 64.887,-33.156 64.887,-33.289 67.132,-33.289 67.087,-33.423 67.043,-33.534 66.954,-33.645 66.865,-33.756 66.754,-33.823 66.62,-33.867 66.487,-33.911 66.154,-33.911 65.976,-33.845 65.82,-33.778 65.665,-33.645 65.087,-33.934 65.198,-34.067 65.309,-34.2 65.465,-34.289 65.598,-34.378 65.754,-34.445 65.931,-34.489 66.131,-34.512 66.331,-34.534 66.487,-34.534 66.643,-34.512 66.776,-34.467 66.909,-34.423 67.043,-34.378 67.176,-34.289 67.287,-34.223 67.376,-34.111
no net on Mechanical 16 "NONET_L-01_P-001" (solid): 248.313,-34.023 248.246,-33.911 248.157,-33.778 248.113,-33.667 248.068,-33.534 248.024,-33.378 248.002,-33.089 248.024,-32.8 248.068,-32.645 248.113,-32.511 248.157,-32.378 248.224,-32.267 248.313,-32.156 248.424,-32.045 248.513,-31.956 248.624,-31.867 248.757,-31.778 248.868,-31.733 249.002,-31.689 249.135,-31.645 249.291,-31.622 249.602,-31.622 249.735,-31.645 249.891,-31.689 250.024,-31.733 250.158,-31.778 250.269,-31.867 250.38,-31.956 250.491,-32.045 250.602,-32.156 250.669,-32.267 250.735,-32.4 250.802,-32.534 250.847,-32.667 250.869,-32.822 250.891,-32.978 250.913,-33.156 250.913,-33.289 248.668,-33.289 248.713,-33.423 248.757,-33.534 248.846,-33.645 248.935,-33.756 249.046,-33.823 249.18,-33.867 249.313,-33.911 249.646,-33.911 249.824,-33.845 249.98,-33.778 250.135,-33.645 250.713,-33.934 250.602,-34.067 250.491,-34.2 250.335,-34.289 250.202,-34.378 250.046,-34.445 249.869,-34.489 249.669,-34.512 249.469,-34.534 249.313,-34.534 249.157,-34.512 249.024,-34.467 248.891,-34.423 248.757,-34.378 248.624,-34.289 248.513,-34.223 248.424,-34.111
no net on Mechanical 16 "NONET_L-01_P-001" (solid): 229.622,-30.133 229.466,-29.889 229.333,-29.622 229.244,-29.355 230.8,-29.355 230.911,-29.466 231.044,-29.555 231.177,-29.644 231.333,-29.711 231.511,-29.778 231.689,-29.8 231.911,-29.822 232.111,-29.844 232.4,-29.822 232.644,-29.8 232.844,-29.733 233.044,-29.666 233.2,-29.555 233.333,-29.466 233.444,-29.333 233.533,-29.2 233.6,-29.044 233.644,-28.822 233.667,-28.555 233.667,-28.244 233.489,-28.4 233.289,-28.555 233.089,-28.666 232.889,-28.777 232.666,-28.844 232.444,-28.889 232.2,-28.933 231.666,-28.933 231.4,-28.889 231.155,-28.822 230.911,-28.733 230.666,-28.622 230.444,-28.466 230.222,-28.311 230.022,-28.111 229.844,-27.911 229.688,-27.666 229.555,-27.444 229.444,-27.177 229.355,-26.911 229.288,-26.644 229.244,-26.333 229.244,-25.71 229.288,-25.399 229.355,-25.088 229.444,-24.821 229.577,-24.555 229.711,-24.31 229.888,-24.066 230.066,-23.866 230.266,-23.688 230.466,-23.532 230.688,-23.421 230.911,-23.31 231.133,-23.221 231.377,-23.177 231.622,-23.132 232.111,-23.132 232.355,-23.177 232.578,-23.221 232.8,-23.31 233.022,-23.399 233.244,-23.532 233.467,-23.71 233.667,-23.888 233.667,-23.266 235.089,-23.266 235.089,-28.466 235.045,-28.8 235,-29.089 234.956,-29.378 234.867,-29.622 234.756,-29.844 234.644,-30.067 234.511,-30.244 234.311,-30.444 234.067,-30.644 233.822,-30.8 233.533,-30.933 233.244,-31.022 232.911,-31.089 232.555,-31.133 232.178,-31.156 231.777,-31.133 231.4,-31.111 231.066,-31.044 230.777,-30.956 230.511,-30.822 230.244,-30.689 230.022,-30.533 229.822,-30.333
no net on Mechanical 16 "NONET_L-01_P-001" (solid): 225.221,-34 225.132,-33.889 225.066,-33.778 225.021,-33.645 224.977,-33.511 224.932,-33.378 224.91,-33.089 224.932,-32.778 225.021,-32.511 225.066,-32.378 225.132,-32.245 225.199,-32.133 225.288,-32.045 225.488,-31.845 225.599,-31.778 225.71,-31.733 225.821,-31.689 225.955,-31.645 226.221,-31.622 226.443,-31.645 226.688,-31.711 226.888,-31.845 227.088,-32 227.088,-31.689 227.777,-31.689 227.777,-34.467 227.088,-34.467 227.088,-34.178 226.888,-34.334 226.666,-34.445 226.466,-34.512 226.243,-34.534 226.11,-34.534 225.977,-34.512 225.843,-34.467 225.732,-34.423 225.621,-34.378 225.51,-34.289 225.31,-34.111
no net on Mechanical 16 "NONET_L-01_P-001" (solid): 229.155,-34.467 229.155,-34.178 229.377,-34.334 229.577,-34.445 229.777,-34.512 230.022,-34.534 230.155,-34.534 230.288,-34.512 230.4,-34.467 230.511,-34.423 230.622,-34.378 230.733,-34.289 230.955,-34.111 231.044,-34 231.111,-33.889 231.177,-33.778 231.244,-33.645 231.289,-33.511 231.311,-33.378 231.333,-33.089 231.311,-32.778 231.244,-32.511 231.2,-32.378 231.133,-32.245 231.044,-32.133 230.955,-32.045 230.755,-31.845 230.644,-31.778 230.533,-31.733 230.422,-31.689 230.288,-31.645 230.044,-31.622 229.799,-31.645 229.577,-31.711 229.355,-31.845 229.155,-32 229.155,-30.622 228.488,-30.622 228.488,-34.467
no net on Mechanical 16 "NONET_L-01_P-001" (solid): 232.089,-34 232.022,-33.889 231.933,-33.756 231.889,-33.645 231.844,-33.511 231.8,-33.378 231.777,-33.222 231.777,-32.911 231.8,-32.778 231.844,-32.622 231.889,-32.489 231.955,-32.356 232.044,-32.222 232.133,-32.111 232.244,-32 232.466,-31.845 232.689,-31.711 232.955,-31.645 233.2,-31.622 233.4,-31.645 233.578,-31.667 233.778,-31.733 233.933,-31.822 234.111,-31.933 234.244,-32.045 234.378,-32.2 234.489,-32.356 234.556,-32.534 234.622,-32.711 234.667,-32.889 234.667,-33.267 234.622,-33.445 234.556,-33.623 234.489,-33.8 234.378,-33.978 234.244,-34.111 234.111,-34.223 233.956,-34.334 233.778,-34.423 233.6,-34.489 233.4,-34.512 233.2,-34.534 233.067,-34.534 232.933,-34.512 232.8,-34.467 232.666,-34.423 232.533,-34.356 232.422,-34.289 232.311,-34.2 232.2,-34.111
no net on Mechanical 16 "NONET_L-01_P-001" (solid): 237.067,-34 237,-33.889 236.934,-33.778 236.867,-33.645 236.823,-33.511 236.8,-33.378 236.778,-33.089 236.8,-32.778 236.867,-32.511 236.934,-32.378 236.978,-32.245 237.067,-32.133 237.156,-32.045 237.356,-31.845 237.467,-31.778 237.578,-31.733 237.689,-31.689 237.823,-31.645 238.067,-31.622 238.312,-31.645 238.534,-31.711 238.756,-31.845 238.934,-32 238.934,-31.689 239.645,-31.689 239.645,-34.467 238.934,-34.467 238.934,-34.178 238.734,-34.334 238.534,-34.445 238.312,-34.512 238.089,-34.534 237.956,-34.534 237.845,-34.512 237.712,-34.467 237.6,-34.423 237.489,-34.378 237.378,-34.289 237.156,-34.111
no net on Mechanical 16 "NONET_L-01_P-001" (solid): 242.09,-34 242.001,-33.889 241.934,-33.756 241.868,-33.645 241.823,-33.511 241.779,-33.378 241.779,-33.222 241.756,-33.089 241.779,-32.911 241.801,-32.778 241.823,-32.622 241.89,-32.489 241.957,-32.356 242.023,-32.222 242.134,-32.111 242.245,-32 242.445,-31.845 242.69,-31.711 242.934,-31.645 243.201,-31.622 243.379,-31.645 243.579,-31.667 243.757,-31.733 243.935,-31.822 244.09,-31.933 244.246,-32.045 244.357,-32.2 244.468,-32.356 244.557,-32.534 244.601,-32.711 244.646,-32.889 244.668,-33.067 244.646,-33.267 244.601,-33.445 244.557,-33.623 244.468,-33.8 244.357,-33.978 244.246,-34.111 244.09,-34.223 243.935,-34.334 243.757,-34.423 243.579,-34.489 243.401,-34.512 243.201,-34.534 243.046,-34.534 242.912,-34.512 242.779,-34.467 242.645,-34.423 242.512,-34.356 242.401,-34.289 242.29,-34.2 242.179,-34.111
no net on Mechanical 16 "NONET_L-01_P-001" (solid): 243.29,-28.022 243.112,-27.777 242.979,-27.533 242.868,-27.266 242.779,-26.999 242.712,-26.711 242.69,-26.422 242.668,-26.11 242.69,-25.799 242.712,-25.488 242.779,-25.199 242.868,-24.91 242.979,-24.666 243.112,-24.421 243.268,-24.177 243.446,-23.955 243.646,-23.755 243.846,-23.599 244.068,-23.443 244.312,-23.332 244.535,-23.243 244.801,-23.177 245.068,-23.132 245.579,-23.132 245.824,-23.177 246.068,-23.221 246.29,-23.31 246.513,-23.421 246.713,-23.555 246.913,-23.71 247.113,-23.888 247.113,-23.266 248.535,-23.266 248.535,-28.933 247.113,-28.933 247.113,-28.333 246.913,-28.511 246.69,-28.689 246.49,-28.8 246.268,-28.911 246.068,-28.978 245.846,-29.044 245.601,-29.066 245.379,-29.089 245.09,-29.066 244.846,-29.022 244.579,-28.955 244.357,-28.866 244.112,-28.755 243.89,-28.6 243.668,-28.422 243.468,-28.222
GND on Bottom Layer "BOT-GND" (solid, pour order 0): 0,0 200,0 200,200 0,200
GND on Signal Layer 1 "S1-GND" (solid, pour order 2): 0,0 200,0 200,200 0,200
GND on Signal Layer 2 "S2-GND" (solid, pour order 4): 0,0 200,0 200,200 0,200

## Keep-outs
Keep-Out Layer:
  the board outline again, w1

## Other copper
Top Layer:
  text "V1" at 14.7,13.1 h4.57

## Silkscreen, mask and mechanical layers (free items; w line width, h text height)
Top Solder:
  rectangle: 0,0 200,200
Bottom Solder:
  rectangle: 0,0 200,200
Mechanical 2:
  the board outline again, w0.127
Mechanical 16:
  drawing of 82 lines, arcs and shapes, not listed
  text "1" at -23.676,233.971 h1.78
  text "2" at 46.191,233.971 h1.78
  text "3" at 115.914,233.971 h1.78
  text "4" at 185.789,233.971 h1.78
  text "5" at 255.639,233.971 h1.78
  text "6" at 325.489,233.971 h1.78
  text "REV" at 255.69,228.51 h1.7
  text "DATE" at 270.93,228.51 h1.7
  text "DESC" at 283.63,228.51 h1.7
  text "ENG" at 354.75,228.51 h1.7
  text "1" at 255.69,223.43 h1.7
  text "5/28/17" at 270.93,223.43 h1.7
  text "INITIAL RELEASE" at 283.63,223.43 h1.7
  text "J. Brinton" at 354.75,223.43 h1.7
  text "A" at -56.095,198.589 h1.78
  text "A" at 370.625,198.589 h1.78
  text "B" at -56.095,144.614 h1.78
  text "B" at 370.625,144.614 h1.78
  text "C" at -56.095,90.639 h1.78
  text "C" at 370.625,90.639 h1.78
  text "D" at -56.095,36.664 h1.78
  text "D" at 370.625,36.664 h1.78
  text "ENGINEER:" at 255.69,-8.98 h1.14
  text "TITLE:" at 293.79,-8.98 h1.14
  text "ALL DIMENSIONS ARE IN MILS (MM)" at 185.205,-10.885 h1.2
  text "Signal Laboratories, Inc." at 220.765,-10.885 h1.78
  text "J. Brinton" at 255.69,-12.155 h1.78
  text "3479 Edison Way" at 220.765,-13.425 h1.78
  text "TOLERANCES:" at 196.254,-15.076 h1.2
  text "Menlo Park CA 94025" at 220.765,-15.965 h1.78
  text "Higgs Antenna" at 294.425,-15.965 h2.2
  text "PCB DESIGNER:" at 255.69,-16.473 h1.14
  text "E" at -56.095,-17.184 h1.78
  text "E" at 370.625,-17.184 h1.78
  text "DECIMALS" at 185.205,-17.87 h1.2
  text "(877) 778-8435" at 220.765,-18.505 h1.78
  text "J. Brinton" at 255.69,-19.775 h1.78
  text ".X     0.1" at 185.205,-21.045 h1.2
  text ".XX    0.05" at 185.205,-23.585 h1.2
  text "DATE:" at 255.69,-24.22 h1.14
  text "PART NO.:" at 293.79,-24.22 h1.14
  text "REV:" at 347.13,-24.22 h1.14
  text ".XXX   0.005" at 185.205,-26.125 h1.2
  text "5/28/2017" at 255.69,-27.395 h1.7
  text "-" at 293.79,-27.395 h1.78
  text "1" at 347.13,-27.395 h1.78
  text "*UNLESS OTHERWISE NOTED" at 184.57,-31.84 h1.2
  text "FILE NAME:" at 255.69,-31.84 h1.14
  text "DWG NO:" at 293.79,-31.84 h1.14
  text "SCALE:" at 347.13,-31.84 h1.14
  text ".PCB_FILE_NAME_NO_PATH" at 256.96,-34.888 h1.78
  text "-" at 293.79,-35.015 h1.78
  text "1:1" at 347.13,-35.015 h1.78
  text "1" at -23.676,-40.349 h1.78
  text "2" at 46.191,-40.349 h1.78
  text "3" at 115.914,-40.349 h1.78
  text "4" at 185.789,-40.349 h1.78
Drill Drawing:
  drawing of 12718 lines, arcs and shapes, not listed
  text "1. FINISH: ENIG" at 233.83,175.58 h1.14
  text "2. NO SOLDERMASK" at 233.83,173.04 h1.14
  text "3. NO OVERLAY" at 233.83,170.5 h1.14
  text "4. CONTROLLED IMPEDANCE (SEE CHART BELOW)" at 233.83,167.96 h1.14
  text "Symbol" at 234.406,160.02 h1.37
  text "Count" at 243.84,160.02 h1.37
  text "Hole Size" at 254.95,160.02 h1.37
  text "Plated" at 276.724,160.02 h1.37
  text "2" at 243.84,157.162 h1.14
  text "47.24mil (1.200mm)" at 254.95,157.162 h1.14
  text "PTH" at 276.724,157.162 h1.14
  text "4" at 243.84,154.305 h1.14
  text "30.00mil (0.762mm)" at 254.95,154.305 h1.14
  text "PTH" at 276.724,154.305 h1.14
  text "8" at 243.84,151.447 h1.14
  text "66.93mil (1.700mm)" at 254.95,151.447 h1.14
  text "PTH" at 276.724,151.447 h1.14
  text "12" at 243.84,148.59 h1.14
  text "118.11mil (3.000mm)" at 254.95,148.59 h1.14
  text "PTH" at 276.724,148.59 h1.14
  text "16" at 243.84,145.732 h1.14
  text "129.92mil (3.300mm)" at 254.95,145.732 h1.14
  text "PTH" at 276.724,145.732 h1.14
  text "477" at 243.84,142.875 h1.14
  text "15.00mil (0.381mm)" at 254.95,142.875 h1.14
  text "PTH" at 276.724,142.875 h1.14
  text "519 Total" at 243.84,140.017 h1.14
Mechanical 32:
  drawing of 82 lines, arcs and shapes, not listed
  text "6" at -9.689,233.971 h1.78
  text "5" at 60.161,233.971 h1.78
  text "4" at 130.011,233.971 h1.78
  text "3" at 199.886,233.971 h1.78
  text "2" at 269.609,233.971 h1.78
  text "1" at 339.476,233.971 h1.78
  text "ENG" at -38.95,228.51 h1.7
  text "DESC" at 32.17,228.51 h1.7
  text "DATE" at 44.87,228.51 h1.7
  text "REV" at 60.11,228.51 h1.7
  text "J. Brinton" at -38.95,223.43 h1.7
  text "INITIAL RELEASE" at 32.17,223.43 h1.7
  text "5/28/17" at 44.87,223.43 h1.7
  text "1" at 60.11,223.43 h1.7
  text "A" at -54.825,198.589 h1.78
  text "A" at 371.895,198.589 h1.78
  text "B" at -54.825,144.614 h1.78
  text "B" at 371.895,144.614 h1.78
  text "C" at -54.825,90.639 h1.78
  text "C" at 371.895,90.639 h1.78
  text "D" at -54.825,36.664 h1.78
  text "D" at 371.895,36.664 h1.78
  text "TITLE:" at 22.01,-8.98 h1.14
  text "ENGINEER:" at 60.11,-8.98 h1.14
  text "Signal Laboratories, Inc." at 95.035,-10.885 h1.78
  text "ALL DIMENSIONS ARE IN MILS (MM)" at 130.595,-10.885 h1.2
  text "J. Brinton" at 60.11,-12.155 h1.78
  text "3479 Edison Way" at 95.035,-13.425 h1.78
  text "TOLERANCES:" at 119.546,-15.076 h1.2
  text "Higgs Antenna" at 21.375,-15.965 h2.2
  text "Menlo Park CA 94025" at 95.035,-15.965 h1.78
  text "PCB DESIGNER:" at 60.11,-16.473 h1.14
  text "E" at -54.825,-17.184 h1.78
  text "E" at 371.895,-17.184 h1.78
  text "DECIMALS" at 130.595,-17.87 h1.2
  text "(877) 778-8435" at 95.035,-18.505 h1.78
  text "J. Brinton" at 60.11,-19.775 h1.78
  text ".X     0.1" at 130.595,-21.045 h1.2
  text ".XX    0.05" at 130.595,-23.585 h1.2
  text "REV:" at -31.33,-24.22 h1.14
  text "PART NO.:" at 22.01,-24.22 h1.14
  text "DATE:" at 60.11,-24.22 h1.14
  text ".XXX   0.005" at 130.595,-26.125 h1.2
  text "1" at -31.33,-27.395 h1.78
  text "-" at 22.01,-27.395 h1.78
  text "5/28/2017" at 60.11,-27.395 h1.7
  text "SCALE:" at -31.33,-31.84 h1.14
  text "DWG NO:" at 22.01,-31.84 h1.14
  text "FILE NAME:" at 60.11,-31.84 h1.14
  text "*UNLESS OTHERWISE NOTED" at 131.23,-31.84 h1.2
  text ".PCB_FILE_NAME_NO_PATH" at 58.84,-34.888 h1.78
  text "1:1" at -31.33,-35.015 h1.78
  text "-" at 22.01,-35.015 h1.78
  text "4" at 130.011,-40.349 h1.78
  text "3" at 199.886,-40.349 h1.78
  text "2" at 269.609,-40.349 h1.78
  text "1" at 339.476,-40.349 h1.78

## Dimensions
0,200 to 200,200 on Drill Drawing
200,0 to 200,200 on Drill Drawing